# Altium PCB MdBBCar_MotorSensor_v1.0.PcbDoc
Units mil, origin at the board's own origin, x right, y up, seen from the top; angles counter-clockwise.
Board outline 1062.71 x 432.78 mil, 2 copper layers (Top Layer, Bottom Layer); 3 components, 6 nets, 28 pads, 24 vias.
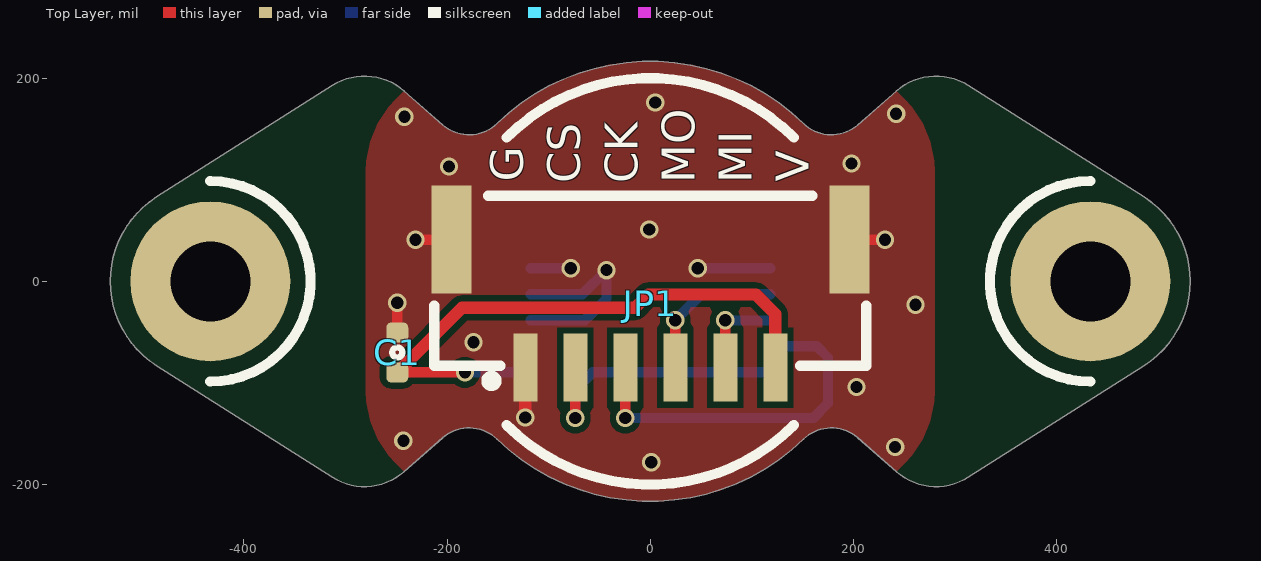
[diagram p0: Top Layer view]
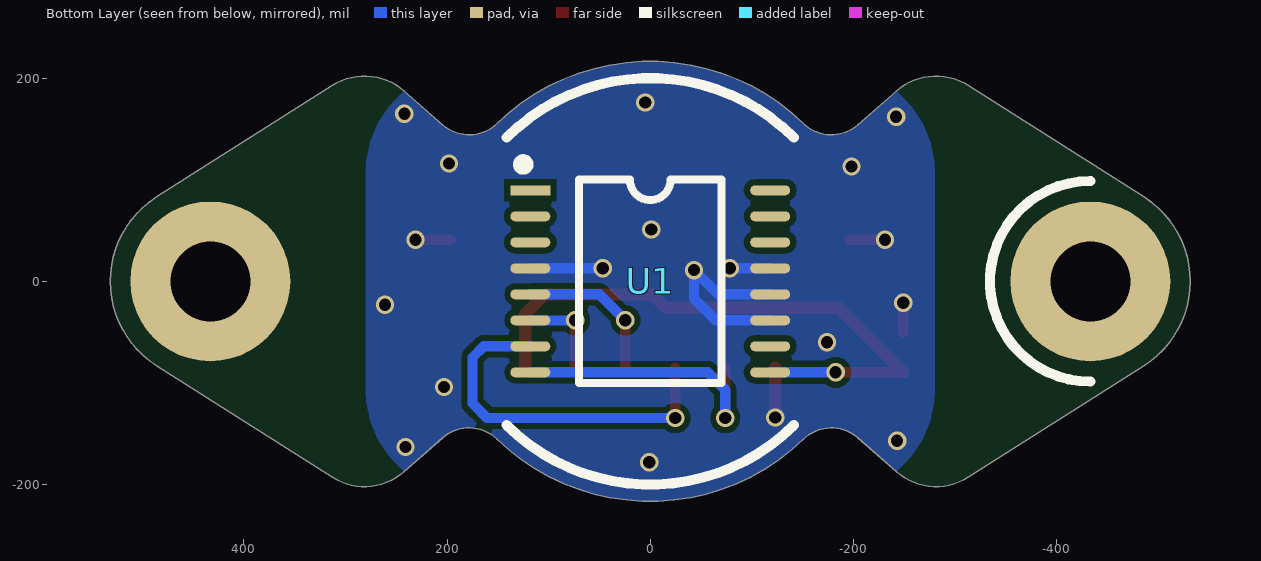
[diagram p1: Bottom Layer view, seen from below]

## Layer stack, top to bottom
Top Solder: solder mask 0.4, Solder Resist, Dk 3.5
Top Layer: signal copper 1.4
Dielectric 1: dielectric 12.6, FR-4, Dk 4.8
Bottom Layer: signal copper 1.4
Bottom Solder: solder mask 0.4, Solder Resist, Dk 3.5

## Board outline
-312.95,-192.82 ccw(c-281.3,-142.96) -242.34,-187.34 -204.3,-153.95 cw(c-178.33,-183.54) -150.89,-155.3 ccw(c0,0) 150.89,-155.3 cw(c178.33,-183.54) 204.3,-153.95 242.34,-187.34 ccw(c281.3,-142.96) 312.95,-192.82 485.82,-83.1 ccw(c433.07,0) 485.82,83.1 312.95,192.82 ccw(c281.3,142.96) 242.34,187.34 204.3,153.95 cw(c178.33,183.54) 150.89,155.3 ccw(c0,0) -150.89,155.3 cw(c-178.33,183.54) -204.3,153.95 -242.34,187.34 ccw(c-281.3,142.96) -312.95,192.82 -485.82,83.1 ccw(c-433.07,0) -485.82,-83.1

## Design rules (kind name [scope] priority, off if disabled: settings)
Clearance [All] p1: gap=6 ignorepadtopadclearanceinfootprint=FALSE
ComponentClearance [All] p1: gap=0 collisioncheckmode=3 verticalgap=0 showdistances=FALSE
PlaneClearance [All] p1: clearance=6
PlaneConnect [All] p1: planeconnectstyle=Direct reliefexpansion=20 reliefentries=4 reliefconductorwidth=10 reliefairgap=10
PolygonConnect [All] p1: connectstyle=Direct reliefconductorwidth=10 reliefentries=4 polygonreliefangle="90 Angle" airgapwidth=10
RoutingVias [All] p1: holewidth=12 width=18 viastyle="Through Hole" minholewidth=12 minwidth=18 maxholewidth=28 maxwidth=50
SolderMaskExpansion [All] p1: expansion=4 istentingtop=FALSE
Width [All] p1: maxlimit=20 minlimit=8 preferedwidth=10
27 further rules are at their usual default settings.

## Components (designator, comment, footprint, x,y, rotation, side; value= is the part's Value field where it differs from the comment)
C1 "104" "C 0402_L" -249,-70 r270 top
JP1 "HDR-1X6" GH1.25-WS-6P 0,-22 r180 top
U1 "MT6835" TSSOP16_L 0,0 r180 bottom

## Footprints (in the part's own frame and the unit in brackets; to place one, negate y for a bottom-side part, rotate by r counter-clockwise, add the part's x,y. Pads: shape width x height; smd on the part's side, far side on the other; paste and mask are expansions set on the pad)
"C 0402_L" [mm] "无极性贴片电容"
  rrect50% 0.5x0.55 smd: 1(-0.5,0) 2(0.5,0)
  silkscreen extent -0.13,-0.13 0.13,0.13, body extent -0.5,-0.25 0.5,0.25, height 0.5
GH1.25-WS-6P [mm]
  rect 0.6x1.7 smd paste+0 mask+0.051: 1(3.125,1.6) 2(1.875,1.6) 3(0.625,1.6) 4(-0.625,1.6) 5(-1.875,1.6) 6(-3.125,1.6)
  rect 1x2.7 smd paste+0 mask+0.051: 7(-4.975,-1.6) 8(4.975,-1.6)
  silkscreen extent -5.4,-2.7 5.4,2.06, body extent -5.38,-2.58 5.38,2.28, height 4.28
TSSOP16_L [mm] "5*6.4*1mm（长宽高）"
  rect 1x0.25 smd: 1(-2.998,2.275)
  oval 1x0.25 smd: 2(-2.998,1.625) 3(-2.998,0.975) 4(-2.998,0.325) 5(-2.998,-0.325) 6(-2.998,-0.975) 7(-2.998,-1.625) 8(-2.998,-2.275) 9(2.998,-2.275) 10(2.998,-1.625) 11(2.998,-0.975) 12(2.998,-0.325) 13(2.998,0.325) 14(2.998,0.975) 15(2.998,1.625) 16(2.998,2.275)
  silkscreen extent -3.3,-2.54 1.78,3.05, body extent -3.2,-2.5 3.2,2.5, height 1.03

## Part data
C1: library part C, "无极性贴片电容", BOM名称=无极性贴片电容, 学习资源=www.ooocke.com, 版权归属=源创客
JP1: library part "Header 6", "6P接插件", BOM名称=6P接插件, 学习资源=www.ooocke.com, 版权归属=源创客
U1: "21bit磁编码芯片"

## Free pads (board coordinates)
  round 157.48 hole 78.74: 5(-433.07,0) 5(433.07,0)

## Via types
v1: diameter 18, hole 12, Top Layer to Bottom Layer, 24 vias

## Nets (pads, with @x,y where several pads share a name; then routed paths per layer and width w, separated by ;. In a path a pad name is that pad's centre, name@x,y a point inside that pad or via, vN(x,y) a via of type N, cw(c..) or ccw(c..) an arc to the next point about the centre after c; other vN are vias at no path point)
CLK: JP1.3 U1.7 | length 361.8
  Top Layer w10: v1(-24.61,-134.61) JP1.3
  Bottom Layer w10: v1(-24.61,-134.61) 160.39,-134.61 175,-120 175,-75 163.98,-63.98 U1.7
CS: JP1.2 U1.8 | length 276.4
  Top Layer w10: v1(-73.82,-134.61) JP1.2
  Bottom Layer w10: v1(-73.82,-134.61) -73.82,-106.82 -56.57,-89.57 U1.8
GND: C1.1 JP1.1 JP1.7 JP1.8 U1.4 U1.11 U1.12 U1.13 | length 456.4
  Top Layer w10: C1.1 v1(-249,-21) ; v1(-230.99,40.99) JP1.8 ; JP1.7 v1(230.99,40.99)
  Top Layer w12: v1(-123.03,-133.97) JP1.1
  Bottom Layer w10: U1.11 -64.39,-38.39 -43,-17 v1(-43,11) -66.8,-12.8 U1.12 ; U1.13 v1(-78.2,12.8) ; v1(46.8,12.8) U1.4
  other v1: 1,-178 241,-163 -243,-157 203,-104 -174,-60 261,-23 -1,51 -198,113 198,116 -242,162 242,165 5,176
MISO: JP1.4 U1.5 | length 150.6
  Top Layer w10: JP1.4 v1(24.6,-38.4)
  Bottom Layer w10: v1(24.6,-38.4) 50.2,-12.8 U1.5
MOSI: JP1.5 U1.6 | length 90.8
  Top Layer w10: JP1.5 v1(73.82,-38.4)
  Bottom Layer w10: v1(73.82,-38.4) U1.6
VDD: C1.2 JP1.6 U1.9 | length 595.5
  Top Layer w10: C1.2@-248.88,-89.57 v1(-182.43,-89.57)
  Top Layer w12: C1.2 -248.88,-89.57 -185.31,-26 -15,-26 -2,-13 104,-13 123.03,-32.03 JP1.6
  Bottom Layer w10: v1(-182.43,-89.57) U1.9
pads on no net: U1.1 U1.2 U1.3 U1.10 U1.14 U1.15 U1.16

## Polygon pours and split planes (outlines as drawn)
GND on Top Layer "GND_L01_P000" (solid, remove dead copper, pour order 0): -312.95,-192.82 ccw(c-281.3,-142.96) -242.34,-187.34 -204.3,-153.95 cw(c-178.33,-183.54) -150.89,-155.3 ccw(c0,0) 150.89,-155.3 cw(c178.33,-183.54) 204.3,-153.95 242.34,-187.34 ccw(c281.3,-142.96) 312.95,-192.82 485.82,-83.1 ccw(c433.07,0) 485.82,83.1 312.95,192.82 ccw(c281.3,142.96) 242.34,187.34 204.3,153.95 cw(c178.33,183.54) 150.89,155.3 ccw(c0,0) -150.89,155.3 cw(c-178.33,183.54) -204.3,153.95 -242.34,187.34 ccw(c-281.3,142.96) -312.95,192.82 -485.82,83.1 ccw(c-433.07,0) -485.82,-83.1
GND on Bottom Layer "GND_L02_P001" (solid, remove dead copper, pour order 1): -312.95,-192.82 ccw(c-281.3,-142.96) -242.34,-187.34 -204.3,-153.95 cw(c-178.33,-183.54) -150.89,-155.3 ccw(c0,0) 150.89,-155.3 cw(c178.33,-183.54) 204.3,-153.95 242.34,-187.34 ccw(c281.3,-142.96) 312.95,-192.82 485.82,-83.1 ccw(c433.07,0) 485.82,83.1 312.95,192.82 ccw(c281.3,142.96) 242.34,187.34 204.3,153.95 cw(c178.33,183.54) 150.89,155.3 ccw(c0,0) -150.89,155.3 cw(c-178.33,183.54) -204.3,153.95 -242.34,187.34 ccw(c-281.3,142.96) -312.95,192.82 -485.82,83.1 ccw(c-433.07,0) -485.82,-83.1

## Other copper
Top Layer:
  pour cut-out: -242.34,187.34 -250.71,178.97 ccw(c-180,108.26) -280,108.26 -280,-108.26 ccw(c-180,-108.26) -250.71,-178.97 -242.34,-187.34 cw(c-277.72,-151.96) -277.72,-202 -353.58,-202 cw(c-353.58,-102) -424.29,-172.71 -558,-39 -558,43.58 cw(c-458,43.58) -528.71,114.29 -457.29,185.71 cw(c-386.58,115) -386.58,215 -268.39,215 cw(c-268.39,170.61) -237,202 -237,200.23 cw(c-255.23,200.23)
  pour cut-out: 242.34,187.34 250.71,178.97 cw(c180,108.26) 280,108.26 280,-108.26 cw(c180,-108.26) 250.71,-178.97 242.34,-187.34 ccw(c277.72,-151.96) 277.72,-202 353.58,-202 ccw(c353.58,-102) 424.29,-172.71 558,-39 558,43.58 ccw(c458,43.58) 528.71,114.29 457.29,185.71 ccw(c386.58,115) 386.58,215 268.38,215 ccw(c268.38,170.62) 237,202 237,200.23 ccw(c255.23,200.23)
Bottom Layer:
  pour cut-out: 242.34,187.34 250.71,178.97 cw(c180,108.26) 280,108.26 280,-108.26 cw(c180,-108.26) 250.71,-178.97 242.34,-187.34 ccw(c277.72,-151.96) 277.72,-202 353.58,-202 ccw(c353.58,-102) 424.29,-172.71 558,-39 558,43.58 ccw(c458,43.58) 528.71,114.29 457.29,185.71 ccw(c386.58,115) 386.58,215 268.39,215 ccw(c268.39,170.61) 237,202 237,200.23 ccw(c255.23,200.23)
  pour cut-out: -242.34,187.34 -250.71,178.97 ccw(c-180,108.26) -280,108.26 -280,-108.26 ccw(c-180,-108.26) -250.71,-178.97 -242.34,-187.34 cw(c-277.72,-151.96) -277.72,-202 -353.58,-202 cw(c-353.58,-102) -424.29,-172.71 -558,-39 -558,43.58 cw(c-458,43.58) -528.71,114.29 -457.29,185.71 cw(c-386.58,115) -386.58,215 -268.39,215 cw(c-268.39,170.61) -237,202 -237,200.23 cw(c-255.23,200.23)

## Silkscreen, mask and mechanical layers (free items; w line width, h text height)
Top Overlay:
  lines w10: -433.07,-98.71 ccw(c-433.07,0) -433.07,98.71 ; -141.42,-141.42 ccw(c0.01,0) 141.43,-141.42 ; -141.42,141.43 cw(c0.01,0) 141.43,141.43 ; 433.07,-98.71 cw(c433.07,0) 433.07,98.71
  text "G" at -124.98,98 h32.69 r90
  text "V" at 156.02,98 h32.69 r90
  text "CS" at -69.1,96.65 h32.45 r90
  text "CK" at -12.48,96.65 h32.45 r90
  text "MO" at 43.9,96.65 h32.45 r90
  text "MI" at 99.9,96.65 h32.45 r90
Bottom Overlay:
  lines w10: -433.07,-98.71 ccw(c-433.07,0) -433.07,98.71 ; -141.42,-141.42 ccw(c0.01,0) 141.43,-141.42 ; -141.42,141.43 cw(c0.01,0) 141.43,141.43
Mechanical 1:
  the board outline again, w3.94